# Altium PCB BloopPadMaxx_01.PcbDoc (part 2 of 3)
Units mm, origin at the board's own origin, x right, y up, seen from the top; angles counter-clockwise.
Board outline 209 x 212 mm, 2 copper layers (Top Layer, Bottom Layer), stack 1.571 mm thick; 206 components, 154 nets, 793 pads, 455 vias.
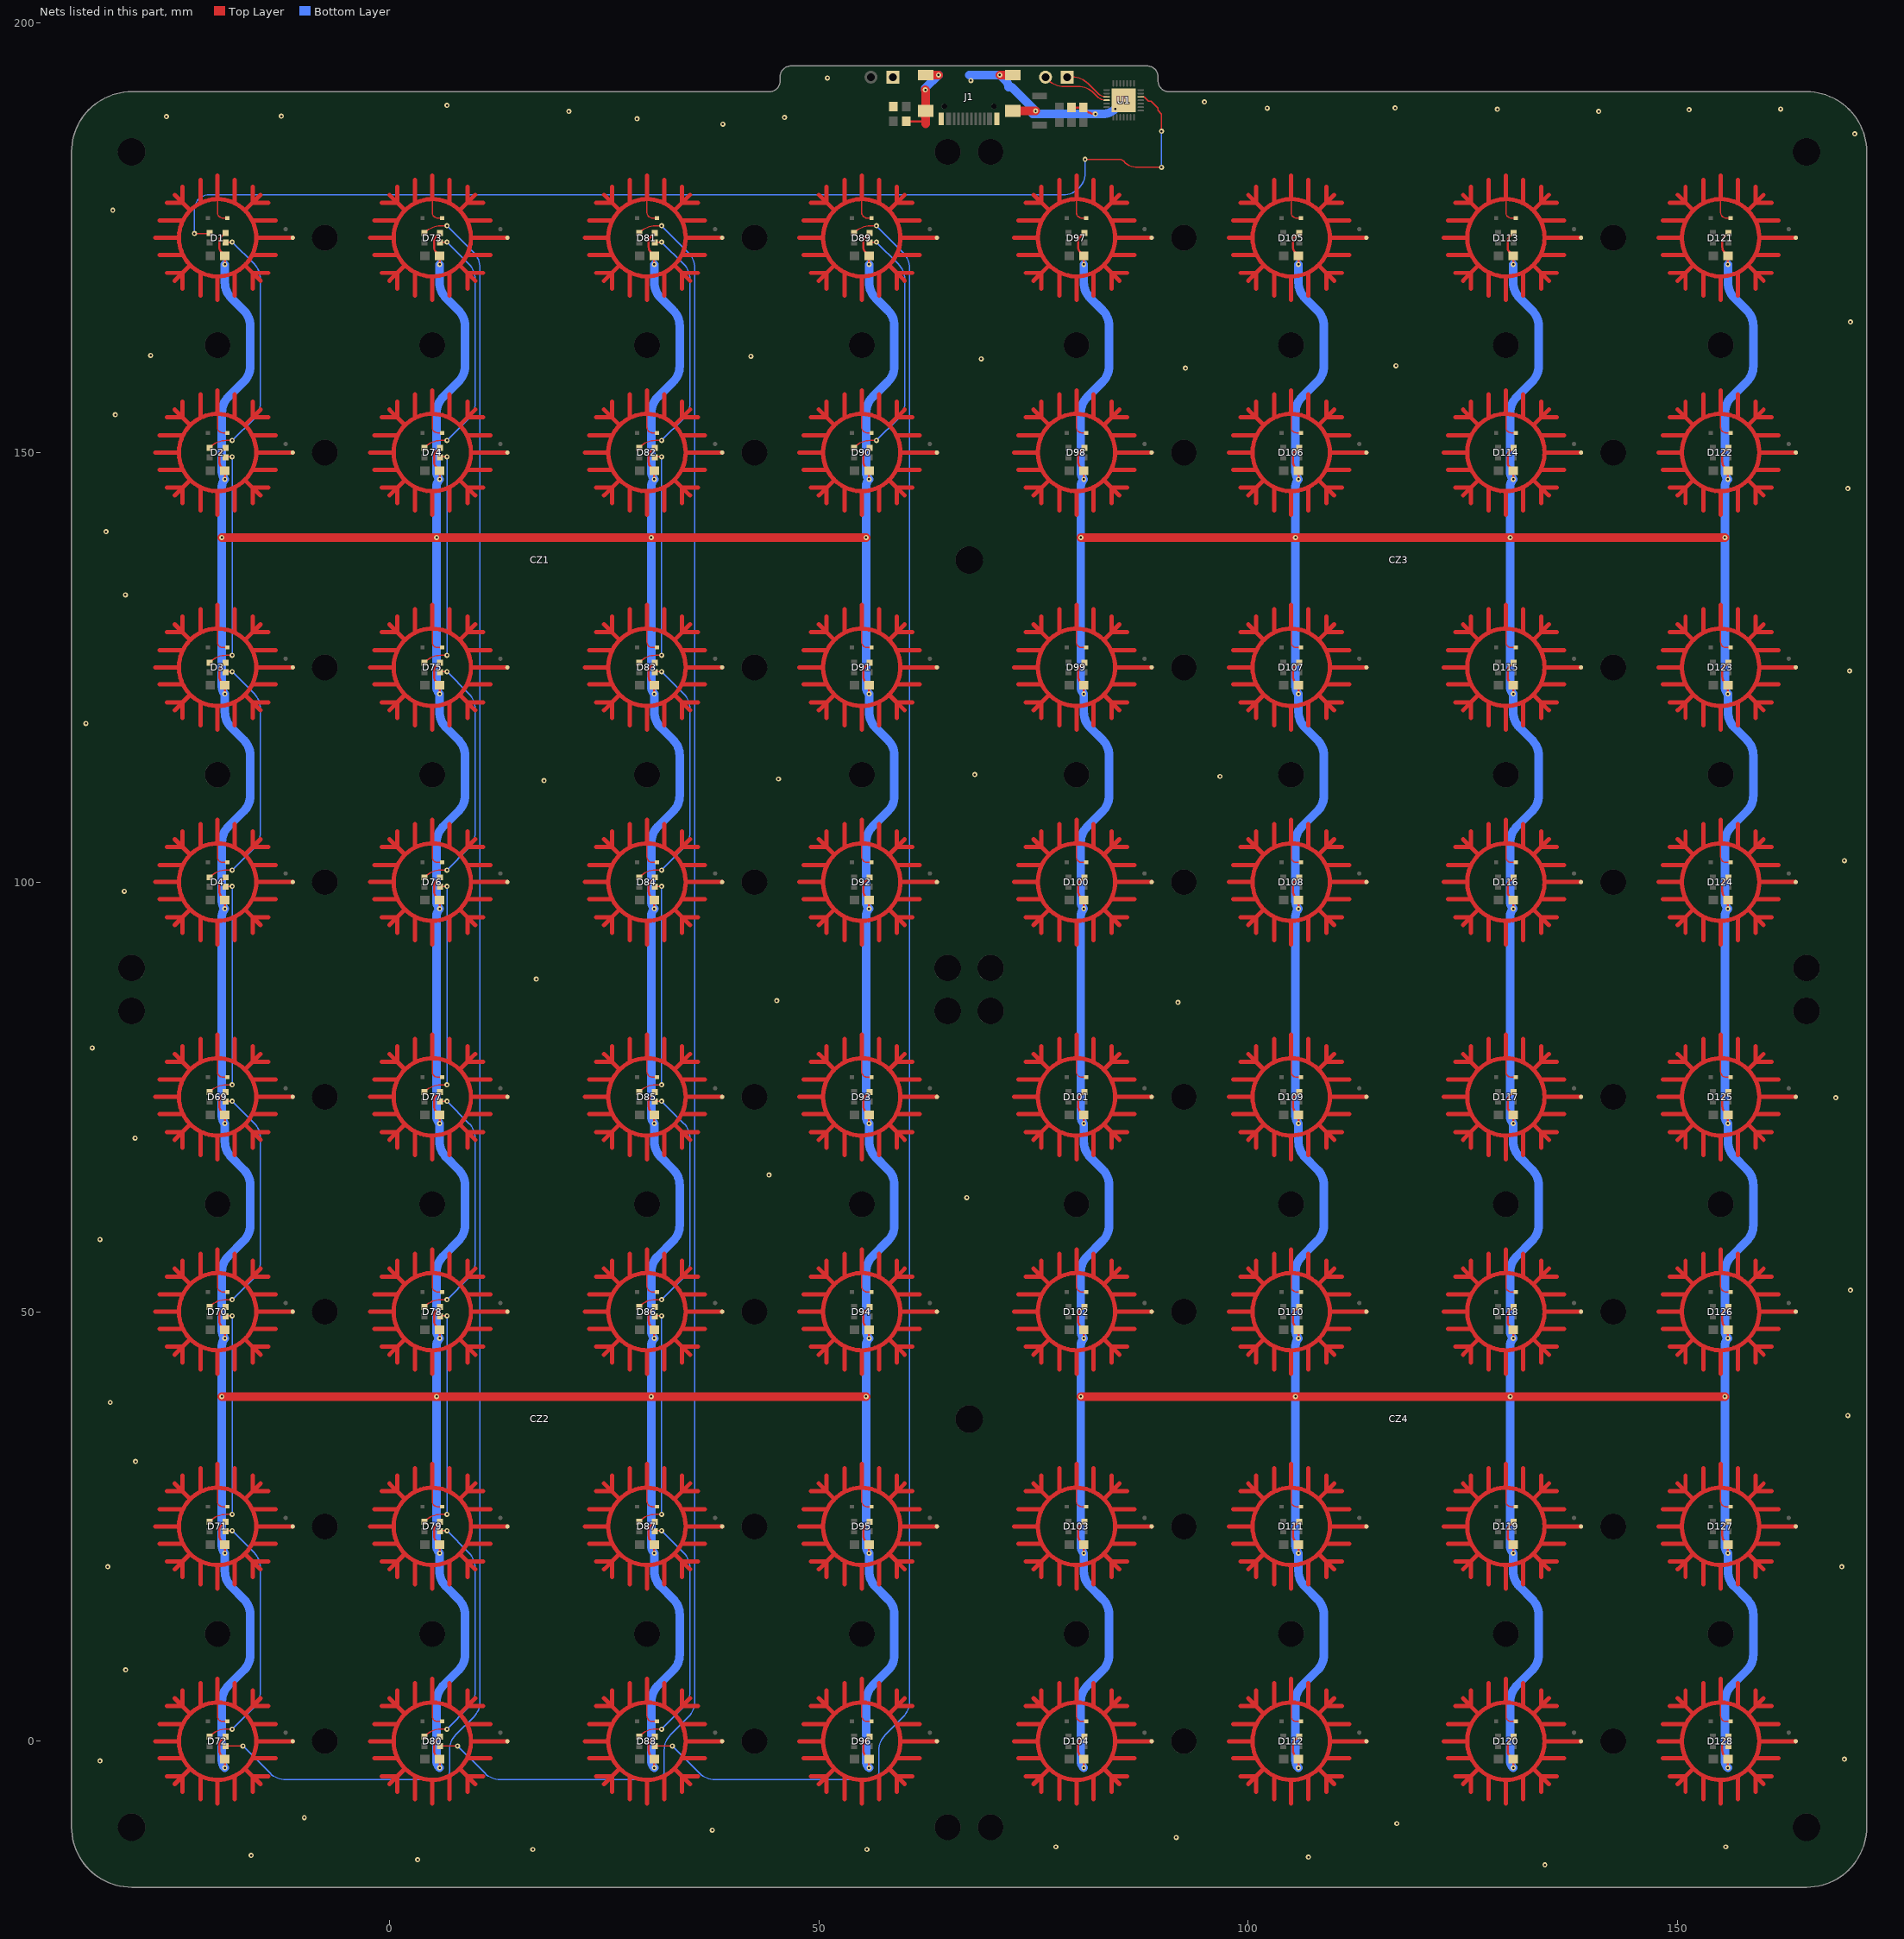
[diagram p2: the nets of this part, all layers, seen from the top]

## Via types
v1: diameter 0.6, hole 0.25, Top Layer to Bottom Layer, 455 vias

## Nets (pads, with @x,y where several pads share a name; then routed paths per layer and width w, separated by ;. In a path a pad name is that pad's centre, name@x,y a point inside that pad or via, vN(x,y) a via of type N, cw(c..) or ccw(c..) an arc to the next point about the centre after c; other vN are vias at no path point) (continued)
GND: C1.2 C2.2 C3.2 C4.2 C5.2 C6.2 C7.2 C8.2 C9.2 C10.2 C11.2 C12.2 C13.2 C14.2 C15.2 C16.2 C17.2 C18.2 C19.2 C20.2 C21.2 C22.2 C23.2 C24.2 C25.2 C26.2 C27.2 C28.2 C29.2 C30.2 C31.2 C32.2 C33.2 C34.2 C35.2 C36.2 C37.2 C38.2 C39.2 C40.2 C41.2 C42.2 C43.2 C44.2 C45.2 C46.2 C47.2 C48.2 C49.2 C50.2 C51.2 C52.2 C53.2 C54.2 C55.2 C56.2 C57.2 C58.2 C59.2 C60.2 C61.2 C62.2 C63.2 C64.2 C65.2 C66.2 D1.2 D2.2 D3.2 D4.2 D69.2 D70.2 D71.2 D72.2 D73.2 D74.2 D75.2 D76.2 D77.2 D78.2 D79.2 D80.2 D81.2 D82.2 D83.2 D84.2 D85.2 D86.2 D87.2 D88.2 D89.2 D90.2 D91.2 D92.2 D93.2 D94.2 D95.2 D96.2 D97.2 D98.2 D99.2 D100.2 D101.2 D102.2 D103.2 D104.2 D105.2 D106.2 D107.2 D108.2 D109.2 D110.2 D111.2 D112.2 D113.2 D114.2 D115.2 D116.2 D117.2 D118.2 D119.2 D120.2 D121.2 D122.2 D123.2 D124.2 D125.2 D126.2 D127.2 D128.2 J1.A1 J1.A12 J1.B1 J1.B12 J1.MH1 J1.MH2 J1.MH3 J1.MH4 P2.1 R2.2 R3.2 U1.29 | length 2081.9
  Top Layer w0.25: v1(-19.15,-3.1) C59.2@-19.15,-2.1 -19.552,-1.698 cw(c-18.955,-1.1) -19.8,-1.1 -19.8,-0.4 cw(c-19.106,-0.4) -19.597,0.091 -19.175,0.513 cw(c-19.085,0.423) D72.2@-19.085,0.55 ; v1(-19.15,21.9) C51.2@-19.15,22.9 -19.552,23.302 cw(c-18.955,23.9) -19.8,23.9 -19.8,24.6 cw(c-19.106,24.6) -19.597,25.091 -19.175,25.513 cw(c-19.085,25.423) D71.2@-19.085,25.55 ; v1(-19.15,46.9) C43.2@-19.15,47.9 -19.552,48.302 cw(c-18.955,48.9) -19.8,48.9 -19.8,49.6 cw(c-19.106,49.6) -19.597,50.091 -19.175,50.513 cw(c-19.085,50.423) D70.2@-19.085,50.55 ; v1(-19.15,71.9) C35.2@-19.15,72.9 -19.552,73.302 cw(c-18.955,73.9) -19.8,73.9 -19.8,74.6 cw(c-19.106,74.6) -19.597,75.091 -19.175,75.513 cw(c-19.085,75.423) D69.2@-19.085,75.55 ; v1(-19.15,96.9) C27.2@-19.15,97.9 -19.552,98.302 cw(c-18.955,98.9) -19.8,98.9 -19.8,99.6 cw(c-19.106,99.6) -19.597,100.091 -19.175,100.513 cw(c-19.085,100.423) D4.2@-19.085,100.55 ; v1(-19.15,121.9) C19.2@-19.15,122.9 -19.552,123.302 cw(c-18.955,123.9) -19.8,123.9 -19.8,124.6 cw(c-19.106,124.6) -19.597,125.091 -19.175,125.513 cw(c-19.085,125.423) D3.2@-19.085,125.55 ; v1(-19.15,146.9) C9.2@-19.15,147.9 -19.552,148.302 cw(c-18.955,148.9) -19.8,148.9 -19.8,149.6 cw(c-19.106,149.6) -19.597,150.091 -19.175,150.513 cw(c-19.085,150.423) D2.2@-19.085,150.55 ; v1(-19.15,171.9) C1.2@-19.15,172.9 -19.552,173.302 cw(c-18.955,173.9) -19.8,173.9 -19.8,174.6 cw(c-19.106,174.6) -19.597,175.091 -19.175,175.513 cw(c-19.085,175.423) D1.2@-19.085,175.55 ; v1(5.85,-3.1) C60.2@5.85,-2.1 5.448,-1.698 cw(c6.045,-1.1) 5.2,-1.1 5.2,-0.4 cw(c5.894,-0.4) 5.403,0.091 5.825,0.513 cw(c5.915,0.423) D80.2@5.915,0.55 ; v1(5.85,21.9) C52.2@5.85,22.9 5.448,23.302 cw(c6.045,23.9) 5.2,23.9 5.2,24.6 cw(c5.894,24.6) 5.403,25.091 5.825,25.513 cw(c5.915,25.423) D79.2@5.915,25.55 ; v1(5.85,46.9) C44.2@5.85,47.9 5.448,48.302 cw(c6.045,48.9) 5.2,48.9 5.2,49.6 cw(c5.894,49.6) 5.403,50.091 5.825,50.513 cw(c5.915,50.423) D78.2@5.915,50.55 ; v1(5.85,71.9) C36.2@5.85,72.9 5.448,73.302 cw(c6.045,73.9) 5.2,73.9 5.2,74.6 cw(c5.894,74.6) 5.403,75.091 5.825,75.513 cw(c5.915,75.423) D77.2@5.915,75.55 ; v1(5.85,96.9) C28.2@5.85,97.9 5.448,98.302 cw(c6.045,98.9) 5.2,98.9 5.2,99.6 cw(c5.894,99.6) 5.403,100.091 5.825,100.513 cw(c5.915,100.423) D76.2@5.915,100.55 ; v1(5.85,121.9) C20.2@5.85,122.9 5.448,123.302 cw(c6.045,123.9) 5.2,123.9 5.2,124.6 cw(c5.894,124.6) 5.403,125.091 5.825,125.513 cw(c5.915,125.423) D75.2@5.915,125.55 ; v1(5.85,146.9) C10.2@5.85,147.9 5.448,148.302 cw(c6.045,148.9) 5.2,148.9 5.2,149.6 cw(c5.894,149.6) 5.403,150.091 5.825,150.513 cw(c5.915,150.423) D74.2@5.915,150.55 ; v1(5.85,171.9) C2.2@5.85,172.9 5.448,173.302 cw(c6.045,173.9) 5.2,173.9 5.2,174.6 cw(c5.894,174.6) 5.403,175.091 5.825,175.513 cw(c5.915,175.423) D73.2@5.915,175.55 ; v1(30.85,-3.1) C61.2@30.85,-2.1 30.448,-1.698 cw(c31.045,-1.1) 30.2,-1.1 30.2,-0.4 cw(c30.894,-0.4) 30.403,0.091 30.825,0.513 cw(c30.915,0.423) D88.2@30.915,0.55 ; v1(30.85,21.9) C53.2@30.85,22.9 30.448,23.302 cw(c31.045,23.9) 30.2,23.9 30.2,24.6 cw(c30.894,24.6) 30.403,25.091 30.825,25.513 cw(c30.915,25.423) D87.2@30.915,25.55 ; v1(30.85,46.9) C45.2@30.85,47.9 30.448,48.302 cw(c31.045,48.9) 30.2,48.9 30.2,49.6 cw(c30.894,49.6) 30.403,50.091 30.825,50.513 cw(c30.915,50.423) D86.2@30.915,50.55 ; v1(30.85,71.9) C37.2@30.85,72.9 30.448,73.302 cw(c31.045,73.9) 30.2,73.9 30.2,74.6 cw(c30.894,74.6) 30.403,75.091 30.825,75.513 cw(c30.915,75.423) D85.2@30.915,75.55 ; v1(30.85,96.9) C29.2@30.85,97.9 30.448,98.302 cw(c31.045,98.9) 30.2,98.9 30.2,99.6 cw(c30.894,99.6) 30.403,100.091 30.825,100.513 cw(c30.915,100.423) D84.2@30.915,100.55 ; v1(30.85,121.9) C21.2@30.85,122.9 30.448,123.302 cw(c31.045,123.9) 30.2,123.9 30.2,124.6 cw(c30.894,124.6) 30.403,125.091 30.825,125.513 cw(c30.915,125.423) D83.2@30.915,125.55 ; v1(30.85,146.9) C11.2@30.85,147.9 30.448,148.302 cw(c31.045,148.9) 30.2,148.9 30.2,149.6 cw(c30.894,149.6) 30.403,150.091 30.825,150.513 cw(c30.915,150.423) D82.2@30.915,150.55 ; v1(30.85,171.9) C3.2@30.85,172.9 30.448,173.302 cw(c31.045,173.9) 30.2,173.9 30.2,174.6 cw(c30.894,174.6) 30.403,175.091 30.825,175.513 cw(c30.915,175.423) D81.2@30.915,175.55 ; v1(55.85,-3.1) C62.2@55.85,-2.1 55.448,-1.698 cw(c56.045,-1.1) 55.2,-1.1 55.2,-0.4 cw(c55.894,-0.4) 55.403,0.091 55.825,0.513 cw(c55.915,0.423) D96.2@55.915,0.55 ; v1(55.85,21.9) C54.2@55.85,22.9 55.448,23.302 cw(c56.045,23.9) 55.2,23.9 55.2,24.6 cw(c55.894,24.6) 55.403,25.091 55.825,25.513 cw(c55.915,25.423) D95.2@55.915,25.55 ; v1(55.85,46.9) C46.2@55.85,47.9 55.448,48.302 cw(c56.045,48.9) 55.2,48.9 55.2,49.6 cw(c55.894,49.6) 55.403,50.091 55.825,50.513 cw(c55.915,50.423) D94.2@55.915,50.55 ; v1(55.85,71.9) C38.2@55.85,72.9 55.448,73.302 cw(c56.045,73.9) 55.2,73.9 55.2,74.6 cw(c55.894,74.6) 55.403,75.091 55.825,75.513 cw(c55.915,75.423) D93.2@55.915,75.55 ; v1(55.85,96.9) C30.2@55.85,97.9 55.448,98.302 cw(c56.045,98.9) 55.2,98.9 55.2,99.6 cw(c55.894,99.6) 55.403,100.091 55.825,100.513 cw(c55.915,100.423) D92.2@55.915,100.55 ; v1(55.85,121.9) C22.2@55.85,122.9 55.448,123.302 cw(c56.045,123.9) 55.2,123.9 55.2,124.6 cw(c55.894,124.6) 55.403,125.091 55.825,125.513 cw(c55.915,125.423) D91.2@55.915,125.55 ; v1(55.85,146.9) C12.2@55.85,147.9 55.448,148.302 cw(c56.045,148.9) 55.2,148.9 55.2,149.6 cw(c55.894,149.6) 55.403,150.091 55.825,150.513 cw(c55.915,150.423) D90.2@55.915,150.55 ; v1(55.85,171.9) C4.2@55.85,172.9 55.448,173.302 cw(c56.045,173.9) 55.2,173.9 55.2,174.6 cw(c55.894,174.6) 55.403,175.091 55.825,175.513 cw(c55.915,175.423) D89.2@55.915,175.55 ; R3.2@60.2,188.55 61.962,188.55 62.4,188.988 62.4,189.738 J1.MH4@62.43,189.768 ; C18.2@79.4,190.15 C17.2@80.8,190.15 81.09,189.86 ccw(c82.2,190.969) v1(82.2,189.4) ; v1(80.85,-3.1) C63.2@80.85,-2.1 80.448,-1.698 cw(c81.045,-1.1) 80.2,-1.1 80.2,-0.4 cw(c80.894,-0.4) 80.403,0.091 80.825,0.513 cw(c80.915,0.423) D104.2@80.915,0.55 ; v1(80.85,21.9) C55.2@80.85,22.9 80.448,23.302 cw(c81.045,23.9) 80.2,23.9 80.2,24.6 cw(c80.894,24.6) 80.403,25.091 80.825,25.513 cw(c80.915,25.423) D103.2@80.915,25.55 ; v1(80.85,46.9) C47.2@80.85,47.9 80.448,48.302 cw(c81.045,48.9) 80.2,48.9 80.2,49.6 cw(c80.894,49.6) 80.403,50.091 80.825,50.513 cw(c80.915,50.423) D102.2@80.915,50.55 ; v1(80.85,71.9) C39.2@80.85,72.9 80.448,73.302 cw(c81.045,73.9) 80.2,73.9 80.2,74.6 cw(c80.894,74.6) 80.403,75.091 80.825,75.513 cw(c80.915,75.423) D101.2@80.915,75.55 ; v1(80.85,96.9) C31.2@80.85,97.9 80.448,98.302 cw(c81.045,98.9) 80.2,98.9 80.2,99.6 cw(c80.894,99.6) 80.403,100.091 80.825,100.513 cw(c80.915,100.423) D100.2@80.915,100.55 ; v1(80.85,121.9) C23.2@80.85,122.9 80.448,123.302 cw(c81.045,123.9) 80.2,123.9 80.2,124.6 cw(c80.894,124.6) 80.403,125.091 80.825,125.513 cw(c80.915,125.423) D99.2@80.915,125.55 ; v1(80.85,146.9) C13.2@80.85,147.9 80.448,148.302 cw(c81.045,148.9) 80.2,148.9 80.2,149.6 cw(c80.894,149.6) 80.403,150.091 80.825,150.513 cw(c80.915,150.423) D98.2@80.915,150.55 ; v1(80.85,171.9) C5.2@80.85,172.9 80.448,173.302 cw(c81.045,173.9) 80.2,173.9 80.2,174.6 cw(c80.894,174.6) 80.403,175.091 80.825,175.513 cw(c80.915,175.423) D97.2@80.915,175.55 ; v1(105.85,-3.1) C64.2@105.85,-2.1 105.448,-1.698 cw(c106.045,-1.1) 105.2,-1.1 105.2,-0.4 cw(c105.894,-0.4) 105.403,0.091 105.825,0.513 cw(c105.915,0.423) D112.2@105.915,0.55 ; v1(105.85,21.9) C56.2@105.85,22.9 105.448,23.302 cw(c106.045,23.9) 105.2,23.9 105.2,24.6 cw(c105.894,24.6) 105.403,25.091 105.825,25.513 cw(c105.915,25.423) D111.2@105.915,25.55 ; v1(105.85,46.9) C48.2@105.85,47.9 105.448,48.302 cw(c106.045,48.9) 105.2,48.9 105.2,49.6 cw(c105.894,49.6) 105.403,50.091 105.825,50.513 cw(c105.915,50.423) D110.2@105.915,50.55 ; v1(105.85,71.9) C40.2@105.85,72.9 105.448,73.302 cw(c106.045,73.9) 105.2,73.9 105.2,74.6 cw(c105.894,74.6) 105.403,75.091 105.825,75.513 cw(c105.915,75.423) D109.2@105.915,75.55 ; v1(105.85,96.9) C32.2@105.85,97.9 105.448,98.302 cw(c106.045,98.9) 105.2,98.9 105.2,99.6 cw(c105.894,99.6) 105.403,100.091 105.825,100.513 cw(c105.915,100.423) D108.2@105.915,100.55 ; v1(105.85,121.9) C24.2@105.85,122.9 105.448,123.302 cw(c106.045,123.9) 105.2,123.9 105.2,124.6 cw(c105.894,124.6) 105.403,125.091 105.825,125.513 cw(c105.915,125.423) D107.2@105.915,125.55 ; v1(105.85,146.9) C14.2@105.85,147.9 105.448,148.302 cw(c106.045,148.9) 105.2,148.9 105.2,149.6 cw(c105.894,149.6) 105.403,150.091 105.825,150.513 cw(c105.915,150.423) D106.2@105.915,150.55 ; v1(105.85,171.9) C6.2@105.85,172.9 105.448,173.302 cw(c106.045,173.9) 105.2,173.9 105.2,174.6 cw(c105.894,174.6) 105.403,175.091 105.825,175.513 cw(c105.915,175.423) D105.2@105.915,175.55 ; v1(130.85,-3.1) C65.2@130.85,-2.1 130.448,-1.698 cw(c131.045,-1.1) 130.2,-1.1 130.2,-0.4 cw(c130.894,-0.4) 130.403,0.091 130.825,0.513 cw(c130.915,0.423) D120.2@130.915,0.55 ; v1(130.85,21.9) C57.2@130.85,22.9 130.448,23.302 cw(c131.045,23.9) 130.2,23.9 130.2,24.6 cw(c130.894,24.6) 130.403,25.091 130.825,25.513 cw(c130.915,25.423) D119.2@130.915,25.55 ; v1(130.85,46.9) C49.2@130.85,47.9 130.448,48.302 cw(c131.045,48.9) 130.2,48.9 130.2,49.6 cw(c130.894,49.6) 130.403,50.091 130.825,50.513 cw(c130.915,50.423) D118.2@130.915,50.55 ; v1(130.85,71.9) C41.2@130.85,72.9 130.448,73.302 cw(c131.045,73.9) 130.2,73.9 130.2,74.6 cw(c130.894,74.6) 130.403,75.091 130.825,75.513 cw(c130.915,75.423) D117.2@130.915,75.55 ; v1(130.85,96.9) C33.2@130.85,97.9 130.448,98.302 cw(c131.045,98.9) 130.2,98.9 130.2,99.6 cw(c130.894,99.6) 130.403,100.091 130.825,100.513 cw(c130.915,100.423) D116.2@130.915,100.55 ; v1(130.85,121.9) C25.2@130.85,122.9 130.448,123.302 cw(c131.045,123.9) 130.2,123.9 130.2,124.6 cw(c130.894,124.6) 130.403,125.091 130.825,125.513 cw(c130.915,125.423) D115.2@130.915,125.55 ; v1(130.85,146.9) C15.2@130.85,147.9 130.448,148.302 cw(c131.045,148.9) 130.2,148.9 130.2,149.6 cw(c130.894,149.6) 130.403,150.091 130.825,150.513 cw(c130.915,150.423) D114.2@130.915,150.55 ; v1(130.85,171.9) C7.2@130.85,172.9 130.448,173.302 cw(c131.045,173.9) 130.2,173.9 130.2,174.6 cw(c130.894,174.6) 130.403,175.091 130.825,175.513 cw(c130.915,175.423) D113.2@130.915,175.55 ; v1(155.85,-3.1) C66.2@155.85,-2.1 155.448,-1.698 cw(c156.045,-1.1) 155.2,-1.1 155.2,-0.4 cw(c155.894,-0.4) 155.403,0.091 155.825,0.513 cw(c155.915,0.423) D128.2@155.915,0.55 ; v1(155.85,21.9) C58.2@155.85,22.9 155.448,23.302 cw(c156.045,23.9) 155.2,23.9 155.2,24.6 cw(c155.894,24.6) 155.403,25.091 155.825,25.513 cw(c155.915,25.423) D127.2@155.915,25.55 ; v1(155.85,46.9) C50.2@155.85,47.9 155.448,48.302 cw(c156.045,48.9) 155.2,48.9 155.2,49.6 cw(c155.894,49.6) 155.403,50.091 155.825,50.513 cw(c155.915,50.423) D126.2@155.915,50.55 ; v1(155.85,71.9) C42.2@155.85,72.9 155.448,73.302 cw(c156.045,73.9) 155.2,73.9 155.2,74.6 cw(c155.894,74.6) 155.403,75.091 155.825,75.513 cw(c155.915,75.423) D125.2@155.915,75.55 ; v1(155.85,96.9) C34.2@155.85,97.9 155.448,98.302 cw(c156.045,98.9) 155.2,98.9 155.2,99.6 cw(c155.894,99.6) 155.403,100.091 155.825,100.513 cw(c155.915,100.423) D124.2@155.915,100.55 ; v1(155.85,121.9) C26.2@155.85,122.9 155.448,123.302 cw(c156.045,123.9) 155.2,123.9 155.2,124.6 cw(c155.894,124.6) 155.403,125.091 155.825,125.513 cw(c155.915,125.423) D123.2@155.915,125.55 ; v1(155.85,146.9) C16.2@155.85,147.9 155.448,148.302 cw(c156.045,148.9) 155.2,148.9 155.2,149.6 cw(c155.894,149.6) 155.403,150.091 155.825,150.513 cw(c155.915,150.423) D122.2@155.915,150.55 ; v1(155.85,171.9) C8.2@155.85,172.9 155.448,173.302 cw(c156.045,173.9) 155.2,173.9 155.2,174.6 cw(c155.894,174.6) 155.403,175.091 155.825,175.513 cw(c155.915,175.423) D121.2@155.915,175.55
  Top Layer w1: v1(-19.5,40.121) v1(5.5,40.121) v1(30.5,40.121) v1(55.5,40.121) ; v1(-19.5,140.121) v1(5.5,140.121) v1(30.5,140.121) v1(55.5,140.121) ; v1(62.4,192.225) 62.43,192.195 J1.MH4@62.43,189.768 62.43,189.068 62.405,189.043 62.43,189.018 ; J1.MH3@62.43,193.948 v1(63.93,193.948) ; v1(71.07,193.948) J1.MH2@72.57,193.948 ; J1.MH1@72.57,189.768 75.232,189.768 v1(75.25,189.75) ; v1(80.5,40.121) v1(105.5,40.121) v1(130.5,40.121) v1(155.5,40.121) ; v1(80.5,140.121) v1(105.5,140.121) v1(130.5,140.121) v1(155.5,140.121) ; 62.43,189.018 62.43,188.55 62.43,188.268 62.43,189.018
  Bottom Layer w1: v1(-19.15,-3.1) cw(c-18.305,-2.255) -19.5,-2.255 -19.5,4.648 cw(c-16.96,4.648) -18.756,6.444 -16.944,8.256 ccw(c-18.74,10.052) -16.2,10.052 -16.2,14.738 ccw(c-18.74,14.738) -16.944,16.534 -18.406,17.996 cw(c-16.61,19.792) -19.15,19.792 v1(-19.15,21.9) cw(c-18.305,22.745) -19.5,22.745 v1(-19.5,40.121) -19.5,46.055 cw(c-18.305,46.055) v1(-19.15,46.9) cw(c-18.305,47.745) -19.5,47.745 -19.5,54.648 cw(c-16.96,54.648) -18.756,56.444 -16.944,58.256 ccw(c-18.74,60.052) -16.2,60.052 -16.2,64.738 ccw(c-18.74,64.738) -16.944,66.534 -18.406,67.996 cw(c-16.61,69.792) -19.15,69.792 v1(-19.15,71.9) cw(c-18.305,72.745) -19.5,72.745 -19.5,96.055 cw(c-18.305,96.055) v1(-19.15,96.9) cw(c-18.305,97.745) -19.5,97.745 -19.5,104.648 cw(c-16.96,104.648) -18.756,106.444 -16.944,108.256 ccw(c-18.74,110.052) -16.2,110.052 -16.2,114.738 ccw(c-18.74,114.738) -16.944,116.534 -18.406,117.996 cw(c-16.61,119.792) -19.15,119.792 v1(-19.15,121.9) cw(c-18.305,122.745) -19.5,122.745 -19.5,146.055 cw(c-18.305,146.055) v1(-19.15,146.9) cw(c-18.305,147.745) -19.5,147.745 -19.5,154.648 cw(c-16.96,154.648) -18.756,156.444 -16.944,158.256 ccw(c-18.74,160.052) -16.2,160.052 -16.2,164.738 ccw(c-18.74,164.738) -16.944,166.534 -18.406,167.996 cw(c-16.61,169.792) -19.15,169.792 v1(-19.15,171.9) ; v1(5.85,-3.1) cw(c6.695,-2.255) 5.5,-2.255 5.5,4.648 cw(c8.04,4.648) 6.244,6.444 8.056,8.256 ccw(c6.26,10.052) 8.8,10.052 8.8,14.738 ccw(c6.26,14.738) 8.056,16.534 6.594,17.996 cw(c8.39,19.792) 5.85,19.792 v1(5.85,21.9) cw(c6.695,22.745) 5.5,22.745 v1(5.5,40.121) 5.5,46.055 cw(c6.695,46.055) v1(5.85,46.9) cw(c6.695,47.745) 5.5,47.745 5.5,54.648 cw(c8.04,54.648) 6.244,56.444 8.056,58.256 ccw(c6.26,60.052) 8.8,60.052 8.8,64.738 ccw(c6.26,64.738) 8.056,66.534 6.594,67.996 cw(c8.39,69.792) 5.85,69.792 v1(5.85,71.9) cw(c6.695,72.745) 5.5,72.745 5.5,96.055 cw(c6.695,96.055) v1(5.85,96.9) cw(c6.695,97.745) 5.5,97.745 5.5,104.648 cw(c8.04,104.648) 6.244,106.444 8.056,108.256 ccw(c6.26,110.052) 8.8,110.052 8.8,114.738 ccw(c6.26,114.738) 8.056,116.534 6.594,117.996 cw(c8.39,119.792) 5.85,119.792 v1(5.85,121.9) cw(c6.695,122.745) 5.5,122.745 5.5,146.055 cw(c6.695,146.055) v1(5.85,146.9) cw(c6.695,147.745) 5.5,147.745 5.5,154.648 cw(c8.04,154.648) 6.244,156.444 8.056,158.256 ccw(c6.26,160.052) 8.8,160.052 8.8,164.738 ccw(c6.26,164.738) 8.056,166.534 6.594,167.996 cw(c8.39,169.792) 5.85,169.792 v1(5.85,171.9) ; v1(30.85,-3.1) cw(c31.695,-2.255) 30.5,-2.255 30.5,4.648 cw(c33.04,4.648) 31.244,6.444 33.056,8.256 ccw(c31.26,10.052) 33.8,10.052 33.8,14.738 ccw(c31.26,14.738) 33.056,16.534 31.594,17.996 cw(c33.39,19.792) 30.85,19.792 v1(30.85,21.9) cw(c31.695,22.745) 30.5,22.745 v1(30.5,40.121) 30.5,46.055 cw(c31.695,46.055) v1(30.85,46.9) cw(c31.695,47.745) 30.5,47.745 30.5,54.648 cw(c33.04,54.648) 31.244,56.444 33.056,58.256 ccw(c31.26,60.052) 33.8,60.052 33.8,64.738 ccw(c31.26,64.738) 33.056,66.534 31.594,67.996 cw(c33.39,69.792) 30.85,69.792 v1(30.85,71.9) cw(c31.695,72.745) 30.5,72.745 30.5,96.055 cw(c31.695,96.055) v1(30.85,96.9) cw(c31.695,97.745) 30.5,97.745 30.5,104.648 cw(c33.04,104.648) 31.244,106.444 33.056,108.256 ccw(c31.26,110.052) 33.8,110.052 33.8,114.738 ccw(c31.26,114.738) 33.056,116.534 31.594,117.996 cw(c33.39,119.792) 30.85,119.792 v1(30.85,121.9) cw(c31.695,122.745) 30.5,122.745 30.5,146.055 cw(c31.695,146.055) v1(30.85,146.9) cw(c31.695,147.745) 30.5,147.745 30.5,154.648 cw(c33.04,154.648) 31.244,156.444 33.056,158.256 ccw(c31.26,160.052) 33.8,160.052 33.8,164.738 ccw(c31.26,164.738) 33.056,166.534 31.594,167.996 cw(c33.39,169.792) 30.85,169.792 v1(30.85,171.9) ; v1(55.85,-3.1) cw(c56.695,-2.255) 55.5,-2.255 55.5,4.648 cw(c58.04,4.648) 56.244,6.444 58.056,8.256 ccw(c56.26,10.052) 58.8,10.052 58.8,14.738 ccw(c56.26,14.738) 58.056,16.534 56.594,17.996 cw(c58.39,19.792) 55.85,19.792 v1(55.85,21.9) cw(c56.695,22.745) 55.5,22.745 v1(55.5,40.121) 55.5,46.055 cw(c56.695,46.055) v1(55.85,46.9) cw(c56.695,47.745) 55.5,47.745 55.5,54.648 cw(c58.04,54.648) 56.244,56.444 58.056,58.256 ccw(c56.26,60.052) 58.8,60.052 58.8,64.738 ccw(c56.26,64.738) 58.056,66.534 56.594,67.996 cw(c58.39,69.792) 55.85,69.792 v1(55.85,71.9) cw(c56.695,72.745) 55.5,72.745 55.5,96.055 cw(c56.695,96.055) v1(55.85,96.9) cw(c56.695,97.745) 55.5,97.745 55.5,104.648 cw(c58.04,104.648) 56.244,106.444 58.056,108.256 ccw(c56.26,110.052) 58.8,110.052 58.8,114.738 ccw(c56.26,114.738) 58.056,116.534 56.594,117.996 cw(c58.39,119.792) 55.85,119.792 v1(55.85,121.9) cw(c56.695,122.745) 55.5,122.745 55.5,146.055 cw(c56.695,146.055) v1(55.85,146.9) cw(c56.695,147.745) 55.5,147.745 55.5,154.648 cw(c58.04,154.648) 56.244,156.444 58.056,158.256 ccw(c56.26,160.052) 58.8,160.052 58.8,164.738 ccw(c56.26,164.738) 58.056,166.534 56.594,167.996 cw(c58.39,169.792) 55.85,169.792 v1(55.85,171.9) ; v1(62.4,192.225) 62.4,192.418 v1(63.93,193.948) ; 67.5,193.948 v1(71.07,193.948) 71.826,193.191 cw(c71.185,192.55) 72.092,192.55 72.45,192.55 v1(75.25,189.75) ; 74.9,189.4 v1(82.2,189.4) 83.051,189.4 ccw(c83.051,191.449) v1(84.5,190) ; v1(80.85,-3.1) cw(c81.695,-2.255) 80.5,-2.255 80.5,4.648 cw(c83.04,4.648) 81.244,6.444 83.056,8.256 ccw(c81.26,10.052) 83.8,10.052 83.8,14.738 ccw(c81.26,14.738) 83.056,16.534 81.594,17.996 cw(c83.39,19.792) 80.85,19.792 v1(80.85,21.9) cw(c81.695,22.745) 80.5,22.745 v1(80.5,40.121) 80.5,46.055 cw(c81.695,46.055) v1(80.85,46.9) cw(c81.695,47.745) 80.5,47.745 80.5,54.648 cw(c83.04,54.648) 81.244,56.444 83.056,58.256 ccw(c81.26,60.052) 83.8,60.052 83.8,64.738 ccw(c81.26,64.738) 83.056,66.534 81.594,67.996 cw(c83.39,69.792) 80.85,69.792 v1(80.85,71.9) cw(c81.695,72.745) 80.5,72.745 80.5,96.055 cw(c81.695,96.055) v1(80.85,96.9) cw(c81.695,97.745) 80.5,97.745 80.5,104.648 cw(c83.04,104.648) 81.244,106.444 83.056,108.256 ccw(c81.26,110.052) 83.8,110.052 83.8,114.738 ccw(c81.26,114.738) 83.056,116.534 81.594,117.996 cw(c83.39,119.792) 80.85,119.792 v1(80.85,121.9) cw(c81.695,122.745) 80.5,122.745 80.5,146.055 cw(c81.695,146.055) v1(80.85,146.9) cw(c81.695,147.745) 80.5,147.745 80.5,154.648 cw(c83.04,154.648) 81.244,156.444 83.056,158.256 ccw(c81.26,160.052) 83.8,160.052 83.8,164.738 ccw(c81.26,164.738) 83.056,166.534 81.594,167.996 cw(c83.39,169.792) 80.85,169.792 v1(80.85,171.9) ; v1(105.85,-3.1) cw(c106.695,-2.255) 105.5,-2.255 105.5,4.648 cw(c108.04,4.648) 106.244,6.444 108.056,8.256 ccw(c106.26,10.052) 108.8,10.052 108.8,14.738 ccw(c106.26,14.738) 108.056,16.534 106.594,17.996 cw(c108.39,19.792) 105.85,19.792 v1(105.85,21.9) cw(c106.695,22.745) 105.5,22.745 v1(105.5,40.121) 105.5,46.055 cw(c106.695,46.055) v1(105.85,46.9) cw(c106.695,47.745) 105.5,47.745 105.5,54.648 cw(c108.04,54.648) 106.244,56.444 108.056,58.256 ccw(c106.26,60.052) 108.8,60.052 108.8,64.738 ccw(c106.26,64.738) 108.056,66.534 106.594,67.996 cw(c108.39,69.792) 105.85,69.792 v1(105.85,71.9) cw(c106.695,72.745) 105.5,72.745 105.5,96.055 cw(c106.695,96.055) v1(105.85,96.9) cw(c106.695,97.745) 105.5,97.745 105.5,104.648 cw(c108.04,104.648) 106.244,106.444 108.056,108.256 ccw(c106.26,110.052) 108.8,110.052 108.8,114.738 ccw(c106.26,114.738) 108.056,116.534 106.594,117.996 cw(c108.39,119.792) 105.85,119.792 v1(105.85,121.9) cw(c106.695,122.745) 105.5,122.745 105.5,146.055 cw(c106.695,146.055) v1(105.85,146.9) cw(c106.695,147.745) 105.5,147.745 105.5,154.648 cw(c108.04,154.648) 106.244,156.444 108.056,158.256 ccw(c106.26,160.052) 108.8,160.052 108.8,164.738 ccw(c106.26,164.738) 108.056,166.534 106.594,167.996 cw(c108.39,169.792) 105.85,169.792 v1(105.85,171.9) ; v1(130.85,-3.1) cw(c131.695,-2.255) 130.5,-2.255 130.5,4.648 cw(c133.04,4.648) 131.244,6.444 133.056,8.256 ccw(c131.26,10.052) 133.8,10.052 133.8,14.738 ccw(c131.26,14.738) 133.056,16.534 131.594,17.996 cw(c133.39,19.792) 130.85,19.792 v1(130.85,21.9) cw(c131.695,22.745) 130.5,22.745 v1(130.5,40.121) 130.5,46.055 cw(c131.695,46.055) v1(130.85,46.9) cw(c131.695,47.745) 130.5,47.745 130.5,54.648 cw(c133.04,54.648) 131.244,56.444 133.056,58.256 ccw(c131.26,60.052) 133.8,60.052 133.8,64.738 ccw(c131.26,64.738) 133.056,66.534 131.594,67.996 cw(c133.39,69.792) 130.85,69.792 v1(130.85,71.9) cw(c131.695,72.745) 130.5,72.745 130.5,96.055 cw(c131.695,96.055) v1(130.85,96.9) cw(c131.695,97.745) 130.5,97.745 130.5,104.648 cw(c133.04,104.648) 131.244,106.444 133.056,108.256 ccw(c131.26,110.052) 133.8,110.052 133.8,114.738 ccw(c131.26,114.738) 133.056,116.534 131.594,117.996 cw(c133.39,119.792) 130.85,119.792 v1(130.85,121.9) cw(c131.695,122.745) 130.5,122.745 130.5,146.055 cw(c131.695,146.055) v1(130.85,146.9) cw(c131.695,147.745) 130.5,147.745 130.5,154.648 cw(c133.04,154.648) 131.244,156.444 133.056,158.256 ccw(c131.26,160.052) 133.8,160.052 133.8,164.738 ccw(c131.26,164.738) 133.056,166.534 131.594,167.996 cw(c133.39,169.792) 130.85,169.792 v1(130.85,171.9) ; v1(155.85,-3.1) cw(c156.695,-2.255) 155.5,-2.255 155.5,4.648 cw(c158.04,4.648) 156.244,6.444 158.056,8.256 ccw(c156.26,10.052) 158.8,10.052 158.8,14.738 ccw(c156.26,14.738) 158.056,16.534 156.594,17.996 cw(c158.39,19.792) 155.85,19.792 v1(155.85,21.9) cw(c156.695,22.745) 155.5,22.745 v1(155.5,40.121) 155.5,46.055 cw(c156.695,46.055) v1(155.85,46.9) cw(c156.695,47.745) 155.5,47.745 155.5,54.648 cw(c158.04,54.648) 156.244,56.444 158.056,58.256 ccw(c156.26,60.052) 158.8,60.052 158.8,64.738 ccw(c156.26,64.738) 158.056,66.534 156.594,67.996 cw(c158.39,69.792) 155.85,69.792 v1(155.85,71.9) cw(c156.695,72.745) 155.5,72.745 155.5,96.055 cw(c156.695,96.055) v1(155.85,96.9) cw(c156.695,97.745) 155.5,97.745 155.5,104.648 cw(c158.04,104.648) 156.244,106.444 158.056,108.256 ccw(c156.26,110.052) 158.8,110.052 158.8,114.738 ccw(c156.26,114.738) 158.056,116.534 156.594,117.996 cw(c158.39,119.792) 155.85,119.792 v1(155.85,121.9) cw(c156.695,122.745) 155.5,122.745 155.5,146.055 cw(c156.695,146.055) v1(155.85,146.9) cw(c156.695,147.745) 155.5,147.745 155.5,154.648 cw(c158.04,154.648) 156.244,156.444 158.056,158.256 ccw(c156.26,160.052) 158.8,160.052 158.8,164.738 ccw(c156.26,164.738) 158.056,166.534 156.594,167.996 cw(c158.39,169.792) 155.85,169.792 v1(155.85,171.9)
  other v1: 134.537,-14.389 3.3,-13.8 107,-13.5 -16.1,-13.3 16.7,-12.6 55.6,-12.6 77.6,-12.3 155.6,-12.3 91.6,-11.2 37.598,-10.35 117.289,-9.586 -9.9,-8.9 -33.7,-2.3 169.4,-2.1 -30.7,8.3 -32.8,20.3 169.1,20.3 -29.54,32.552 169.8,37.9 -32.5,39.43 170.1,52.5 -33.7,58.4 67.237,63.279 44.2,65.9 -29.6,70.2 168.4,74.9 -34.6,80.7 91.8,86 45.1,86.2 17.1,88.7 -30.85,98.925 169.4,102.5 18,111.8 45.3,112 96.7,112.3 68.156,112.514 -35.326,118.466 170.017,124.58 -30.741,133.422 -33,140.8 169.8,145.8 -31.9,154.4 92.689,159.835 117.2,160.1 68.9,160.9 42.1,161.2 -27.8,161.3 170.1,165.2 -32.2,178.2 170.608,187.1 38.82,188.228 28.839,188.848 46,189 -25.962,189.096 -12.571,189.158 20.9,189.7 140.8,189.7 151.317,189.916 128.998,189.952 161.984,189.987 102.208,190.092 117.1,190.1 6.7,190.4 94.9,190.8 67.7,193.3 51,193.6
IO.DCK: P1.1 U1.24 | length 5.4
  Top Layer w0.15: P1.1@78.93,193.7 79.548,193.7 cw(c79.548,191.16) 81.344,192.956 82.458,191.842 ccw(c83.525,192.909) U1.24@83.525,191.4
IO.DIO: P1.2 U1.25 | length 8
  Top Layer w0.15: P1.2@76.39,193.7 76.746,193.344 ccw(c78.542,195.14) 78.542,192.6 80.224,192.6 cw(c80.224,190.06) 82.02,191.856 82.417,191.459 ccw(c83.525,192.567) U1.25@83.525,191
LED.DIN: D1.3 U1.12 | length 131.1
  Top Layer w0.15: v1(-22.7,175.5) -20.965,175.5 D1.3@-20.915,175.55 ; v1(81,184.14) 84.921,184.14 cw(c84.921,183.321) 85.5,183.9 ccw(c87.118,185.42) 87.118,183.2 v1(89.9,183.2) ; U1.12@87.475,191.4 87.9,191.4 88.4,190.9 88.665,190.9 89.465,190.1 89.465,189.835 89.9,189.4 v1(89.9,187.4)
  Bottom Layer w0.15: v1(-22.7,175.5) -22.7,178.3 cw(c-21,178.3) -21,180 78.46,180 ccw(c78.46,182.54) 81,182.54 v1(81,184.14) ; v1(89.9,183.2) v1(89.9,187.4)
LED.DOUT: D128.1
NetCZ1_1: CZ1.1 D17.C | length 3.1
  Top Layer w0.15: -20,179.5 -20,177.9 ccw(c-19.4,177.9) -19.4,177.3 D17.C@-18.86,177.3
NetCZ1_3: CZ1.3 D13.C | length 3.1
  Top Layer w0.15: 5,179.5 5,177.9 ccw(c5.6,177.9) 5.6,177.3 D13.C@6.14,177.3
NetCZ1_5: CZ1.5 D9.C | length 3.1
  Top Layer w0.15: 30,179.5 30,177.9 ccw(c30.6,177.9) 30.6,177.3 D9.C@31.14,177.3
NetCZ1_7: CZ1.7 D5.C | length 3.1
  Top Layer w0.15: 55,179.5 55,177.9 ccw(c55.6,177.9) 55.6,177.3 D5.C@56.14,177.3
NetCZ1_9: CZ1.9 D33.C | length 3.1
  Top Layer w0.15: -20,154.5 -20,152.9 ccw(c-19.4,152.9) -19.4,152.3 D33.C@-18.86,152.3
NetCZ1_11: CZ1.11 D29.C | length 3.1
  Top Layer w0.15: 5,154.5 5,152.9 ccw(c5.6,152.9) 5.6,152.3 D29.C@6.14,152.3
NetCZ1_13: CZ1.13 D25.C | length 3.1
  Top Layer w0.15: 30,154.5 30,152.9 ccw(c30.6,152.9) 30.6,152.3 D25.C@31.14,152.3
NetCZ1_15: CZ1.15 D21.C | length 3.1
  Top Layer w0.15: 55,154.5 55,152.9 ccw(c55.6,152.9) 55.6,152.3 D21.C@56.14,152.3
NetCZ1_17: CZ1.17 D49.C | length 3.1
  Top Layer w0.15: -20,129.5 -20,127.9 ccw(c-19.4,127.9) -19.4,127.3 D49.C@-18.86,127.3
NetCZ1_19: CZ1.19 D45.C | length 3.1
  Top Layer w0.15: 5,129.5 5,127.9 ccw(c5.6,127.9) 5.6,127.3 D45.C@6.14,127.3
NetCZ1_21: CZ1.21 D41.C | length 3.1
  Top Layer w0.15: 30,129.5 30,127.9 ccw(c30.6,127.9) 30.6,127.3 D41.C@31.14,127.3
NetCZ1_23: CZ1.23 D37.C | length 3.1
  Top Layer w0.15: 55,129.5 55,127.9 ccw(c55.6,127.9) 55.6,127.3 D37.C@56.14,127.3
NetCZ1_25: CZ1.25 D65.C | length 3.1
  Top Layer w0.15: -20,104.5 -20,102.9 ccw(c-19.4,102.9) -19.4,102.3 D65.C@-18.86,102.3
NetCZ1_27: CZ1.27 D61.C | length 3.1
  Top Layer w0.15: 5,104.5 5,102.9 ccw(c5.6,102.9) 5.6,102.3 D61.C@6.14,102.3
NetCZ1_29: CZ1.29 D57.C | length 3.1
  Top Layer w0.15: 30,104.5 30,102.9 ccw(c30.6,102.9) 30.6,102.3 D57.C@31.14,102.3
NetCZ1_31: CZ1.31 D53.C | length 3.1
  Top Layer w0.15: 55,104.5 55,102.9 ccw(c55.6,102.9) 55.6,102.3 D53.C@56.14,102.3
NetCZ2_1: CZ2.1 D18.C | length 3.1
  Top Layer w0.15: -20,79.5 -20,77.9 ccw(c-19.4,77.9) -19.4,77.3 D18.C@-18.86,77.3
NetCZ2_3: CZ2.3 D14.C | length 3.1
  Top Layer w0.15: 5,79.5 5,77.9 ccw(c5.6,77.9) 5.6,77.3 D14.C@6.14,77.3
NetCZ2_5: CZ2.5 D10.C | length 3.1
  Top Layer w0.15: 30,79.5 30,77.9 ccw(c30.6,77.9) 30.6,77.3 D10.C@31.14,77.3
NetCZ2_7: CZ2.7 D6.C | length 3.1
  Top Layer w0.15: 55,79.5 55,77.9 ccw(c55.6,77.9) 55.6,77.3 D6.C@56.14,77.3
NetCZ2_9: CZ2.9 D34.C | length 3.1
  Top Layer w0.15: -20,54.5 -20,52.9 ccw(c-19.4,52.9) -19.4,52.3 D34.C@-18.86,52.3
NetCZ2_11: CZ2.11 D30.C | length 3.1
  Top Layer w0.15: 5,54.5 5,52.9 ccw(c5.6,52.9) 5.6,52.3 D30.C@6.14,52.3
NetCZ2_13: CZ2.13 D26.C | length 3.1
  Top Layer w0.15: 30,54.5 30,52.9 ccw(c30.6,52.9) 30.6,52.3 D26.C@31.14,52.3
NetCZ2_15: CZ2.15 D22.C | length 3.1
  Top Layer w0.15: 55,54.5 55,52.9 ccw(c55.6,52.9) 55.6,52.3 D22.C@56.14,52.3
NetCZ2_17: CZ2.17 D50.C | length 3.1
  Top Layer w0.15: -20,29.5 -20,27.9 ccw(c-19.4,27.9) -19.4,27.3 D50.C@-18.86,27.3
NetCZ2_19: CZ2.19 D46.C | length 3.1
  Top Layer w0.15: 5,29.5 5,27.9 ccw(c5.6,27.9) 5.6,27.3 D46.C@6.14,27.3
NetCZ2_21: CZ2.21 D42.C | length 3.1
  Top Layer w0.15: 30,29.5 30,27.9 ccw(c30.6,27.9) 30.6,27.3 D42.C@31.14,27.3
NetCZ2_23: CZ2.23 D38.C | length 3.1
  Top Layer w0.15: 55,29.5 55,27.9 ccw(c55.6,27.9) 55.6,27.3 D38.C@56.14,27.3
NetCZ2_25: CZ2.25 D66.C | length 3.1
  Top Layer w0.15: -20,4.5 -20,2.9 ccw(c-19.4,2.9) -19.4,2.3 D66.C@-18.86,2.3
NetCZ2_27: CZ2.27 D62.C | length 3.1
  Top Layer w0.15: 5,4.5 5,2.9 ccw(c5.6,2.9) 5.6,2.3 D62.C@6.14,2.3
NetCZ2_29: CZ2.29 D58.C | length 3.1
  Top Layer w0.15: 30,4.5 30,2.9 ccw(c30.6,2.9) 30.6,2.3 D58.C@31.14,2.3
NetCZ2_31: CZ2.31 D54.C | length 3.1
  Top Layer w0.15: 55,4.5 55,2.9 ccw(c55.6,2.9) 55.6,2.3 D54.C@56.14,2.3
NetCZ3_1: CZ3.1 D19.C | length 3.1
  Top Layer w0.15: 80,179.5 80,177.9 ccw(c80.6,177.9) 80.6,177.3 D19.C@81.14,177.3
NetCZ3_3: CZ3.3 D15.C | length 3.1
  Top Layer w0.15: 105,179.5 105,177.9 ccw(c105.6,177.9) 105.6,177.3 D15.C@106.14,177.3
NetCZ3_5: CZ3.5 D11.C | length 3.1
  Top Layer w0.15: 130,179.5 130,177.9 ccw(c130.6,177.9) 130.6,177.3 D11.C@131.14,177.3
NetCZ3_7: CZ3.7 D7.C | length 3.1
  Top Layer w0.15: 155,179.5 155,177.9 ccw(c155.6,177.9) 155.6,177.3 D7.C@156.14,177.3
NetCZ3_9: CZ3.9 D35.C | length 3.1
  Top Layer w0.15: 80,154.5 80,152.9 ccw(c80.6,152.9) 80.6,152.3 D35.C@81.14,152.3
NetCZ3_11: CZ3.11 D31.C | length 3.1
  Top Layer w0.15: 105,154.5 105,152.9 ccw(c105.6,152.9) 105.6,152.3 D31.C@106.14,152.3
NetCZ3_13: CZ3.13 D27.C | length 3.1
  Top Layer w0.15: 130,154.5 130,152.9 ccw(c130.6,152.9) 130.6,152.3 D27.C@131.14,152.3
NetCZ3_15: CZ3.15 D23.C | length 3.1
  Top Layer w0.15: 155,154.5 155,152.9 ccw(c155.6,152.9) 155.6,152.3 D23.C@156.14,152.3
NetCZ3_17: CZ3.17 D51.C | length 3.1
  Top Layer w0.15: 80,129.5 80,127.9 ccw(c80.6,127.9) 80.6,127.3 D51.C@81.14,127.3
NetCZ3_19: CZ3.19 D47.C | length 3.1
  Top Layer w0.15: 105,129.5 105,127.9 ccw(c105.6,127.9) 105.6,127.3 D47.C@106.14,127.3
NetCZ3_21: CZ3.21 D43.C | length 3.1
  Top Layer w0.15: 130,129.5 130,127.9 ccw(c130.6,127.9) 130.6,127.3 D43.C@131.14,127.3
NetCZ3_23: CZ3.23 D39.C | length 3.1
  Top Layer w0.15: 155,129.5 155,127.9 ccw(c155.6,127.9) 155.6,127.3 D39.C@156.14,127.3
NetCZ3_25: CZ3.25 D67.C | length 3.1
  Top Layer w0.15: 80,104.5 80,102.9 ccw(c80.6,102.9) 80.6,102.3 D67.C@81.14,102.3
NetCZ3_27: CZ3.27 D63.C | length 3.1
  Top Layer w0.15: 105,104.5 105,102.9 ccw(c105.6,102.9) 105.6,102.3 D63.C@106.14,102.3
NetCZ3_29: CZ3.29 D59.C | length 3.1
  Top Layer w0.15: 130,104.5 130,102.9 ccw(c130.6,102.9) 130.6,102.3 D59.C@131.14,102.3
NetCZ3_31: CZ3.31 D55.C | length 3.1
  Top Layer w0.15: 155,104.5 155,102.9 ccw(c155.6,102.9) 155.6,102.3 D55.C@156.14,102.3
NetCZ4_1: CZ4.1 D20.C | length 3.1
  Top Layer w0.15: 80,79.5 80,77.9 ccw(c80.6,77.9) 80.6,77.3 D20.C@81.14,77.3
NetCZ4_3: CZ4.3 D16.C | length 3.1
  Top Layer w0.15: 105,79.5 105,77.9 ccw(c105.6,77.9) 105.6,77.3 D16.C@106.14,77.3
NetCZ4_5: CZ4.5 D12.C | length 3.1
  Top Layer w0.15: 130,79.5 130,77.9 ccw(c130.6,77.9) 130.6,77.3 D12.C@131.14,77.3
NetCZ4_7: CZ4.7 D8.C | length 3.1
  Top Layer w0.15: 155,79.5 155,77.9 ccw(c155.6,77.9) 155.6,77.3 D8.C@156.14,77.3
NetCZ4_9: CZ4.9 D36.C | length 3.1
  Top Layer w0.15: 80,54.5 80,52.9 ccw(c80.6,52.9) 80.6,52.3 D36.C@81.14,52.3
NetCZ4_11: CZ4.11 D32.C | length 3.1
  Top Layer w0.15: 105,54.5 105,52.9 ccw(c105.6,52.9) 105.6,52.3 D32.C@106.14,52.3
NetCZ4_13: CZ4.13 D28.C | length 3.1
  Top Layer w0.15: 130,54.5 130,52.9 ccw(c130.6,52.9) 130.6,52.3 D28.C@131.14,52.3
NetCZ4_15: CZ4.15 D24.C | length 3.1
  Top Layer w0.15: 155,54.5 155,52.9 ccw(c155.6,52.9) 155.6,52.3 D24.C@156.14,52.3
NetCZ4_17: CZ4.17 D52.C | length 3.1
  Top Layer w0.15: 80,29.5 80,27.9 ccw(c80.6,27.9) 80.6,27.3 D52.C@81.14,27.3
NetCZ4_19: CZ4.19 D48.C | length 3.1
  Top Layer w0.15: 105,29.5 105,27.9 ccw(c105.6,27.9) 105.6,27.3 D48.C@106.14,27.3
NetCZ4_21: CZ4.21 D44.C | length 3.1
  Top Layer w0.15: 130,29.5 130,27.9 ccw(c130.6,27.9) 130.6,27.3 D44.C@131.14,27.3
NetCZ4_23: CZ4.23 D40.C | length 3.1
  Top Layer w0.15: 155,29.5 155,27.9 ccw(c155.6,27.9) 155.6,27.3 D40.C@156.14,27.3
NetCZ4_25: CZ4.25 D68.C | length 3.1
  Top Layer w0.15: 80,4.5 80,2.9 ccw(c80.6,2.9) 80.6,2.3 D68.C@81.14,2.3
NetCZ4_27: CZ4.27 D64.C | length 3.1
  Top Layer w0.15: 105,4.5 105,2.9 ccw(c105.6,2.9) 105.6,2.3 D64.C@106.14,2.3
NetCZ4_29: CZ4.29 D60.C | length 3.1
  Top Layer w0.15: 130,4.5 130,2.9 ccw(c130.6,2.9) 130.6,2.3 D60.C@131.14,2.3
NetCZ4_31: CZ4.31 D56.C | length 3.1
  Top Layer w0.15: 155,4.5 155,2.9 ccw(c155.6,2.9) 155.6,2.3 D56.C@156.14,2.3
NetD1_1: D1.1 D2.3 | length 29.3
  Top Layer w0.15: D2.3@-20.915,150.55 -20.809,150.656 cw(c-19.013,148.86) -19.013,151.4 v1(-18.3,151.4) ; D1.1@-19.085,174.45 -19.035,174.5 v1(-18.3,174.5)
  Bottom Layer w0.15: v1(-18.3,151.4) -15.744,153.956 ccw(c-17.54,155.752) -15,155.752 -15,170.148 ccw(c-17.54,170.148) -15.744,171.944 v1(-18.3,174.5)
NetD2_1: D2.1 D3.3 | length 26.8
  Top Layer w0.15: D3.3@-20.915,125.55 -20.809,125.656 cw(c-19.013,123.86) -19.013,126.4 v1(-18.3,126.4) ; D2.1@-19.085,149.45 -19.035,149.5 v1(-18.3,149.5)
  Bottom Layer w0.15: v1(-18.3,126.4) v1(-18.3,149.5)
NetD3_1: D3.1 D4.3 | length 29.3
  Top Layer w0.15: D4.3@-20.915,100.55 -20.809,100.656 cw(c-19.013,98.86) -19.013,101.4 v1(-18.3,101.4) ; D3.1@-19.085,124.45 -19.035,124.5 v1(-18.3,124.5)
  Bottom Layer w0.15: v1(-18.3,101.4) -15.744,103.956 ccw(c-17.54,105.752) -15,105.752 -15,120.148 ccw(c-17.54,120.148) -15.744,121.944 v1(-18.3,124.5)
NetD4_1: D4.1 D69.3 | length 26.8
  Top Layer w0.15: D69.3@-20.915,75.55 -20.809,75.656 cw(c-19.013,73.86) -19.013,76.4 v1(-18.3,76.4) ; D4.1@-19.085,99.45 -19.035,99.5 v1(-18.3,99.5)
  Bottom Layer w0.15: v1(-18.3,76.4) v1(-18.3,99.5)
NetD69_1: D69.1 D70.3 | length 29.3
  Top Layer w0.15: D70.3@-20.915,50.55 -20.809,50.656 cw(c-19.013,48.86) -19.013,51.4 v1(-18.3,51.4) ; D69.1@-19.085,74.45 -19.035,74.5 v1(-18.3,74.5)
  Bottom Layer w0.15: v1(-18.3,51.4) -15.744,53.956 ccw(c-17.54,55.752) -15,55.752 -15,70.148 ccw(c-17.54,70.148) -15.744,71.944 v1(-18.3,74.5)
NetD70_1: D70.1 D71.3 | length 26.8
  Top Layer w0.15: D71.3@-20.915,25.55 -20.809,25.656 cw(c-19.013,23.86) -19.013,26.4 v1(-18.3,26.4) ; D70.1@-19.085,49.45 -19.035,49.5 v1(-18.3,49.5)
  Bottom Layer w0.15: v1(-18.3,26.4) v1(-18.3,49.5)
NetD71_1: D71.1 D72.3 | length 29.3
  Top Layer w0.15: D72.3@-20.915,0.55 -20.809,0.656 cw(c-19.013,-1.14) -19.013,1.4 v1(-18.3,1.4) ; D71.1@-19.085,24.45 -19.035,24.5 v1(-18.3,24.5)
  Bottom Layer w0.15: v1(-18.3,1.4) -15.744,3.956 ccw(c-17.54,5.752) -15,5.752 -15,20.148 ccw(c-17.54,20.148) -15.744,21.944 v1(-18.3,24.5)
NetD72_1: D72.1 D73.3 | length 213.7
  Top Layer w0.15: D72.1@-19.085,-0.55 v1(-17.05,-0.55) ; D73.3@4.085,175.55 4.191,175.656 cw(c5.987,173.86) 5.987,176.4 v1(6.7,176.4)
  Bottom Layer w0.15: v1(-17.05,-0.55) -13.878,-3.722 ccw(c-12.082,-1.926) -12.082,-4.466 6.034,-4.466 ccw(c6.034,-3.5) 7,-3.5 7,-1.052 cw(c9.54,-1.052) 7.744,0.744 9.816,2.816 ccw(c8.02,4.612) 10.56,4.612 10.56,171.488 ccw(c8.02,171.488) 9.816,173.284 v1(6.7,176.4)
NetD73_1: D73.1 D74.3 | length 29.3
  Top Layer w0.15: D74.3@4.085,150.55 4.191,150.656 cw(c5.987,148.86) 5.987,151.4 v1(6.7,151.4) ; D73.1@5.915,174.45 5.965,174.5 v1(6.7,174.5)
  Bottom Layer w0.15: v1(6.7,151.4) 9.256,153.956 ccw(c7.46,155.752) 10,155.752 10,170.148 ccw(c7.46,170.148) 9.256,171.944 v1(6.7,174.5)
NetD74_1: D74.1 D75.3 | length 26.8
  Top Layer w0.15: D75.3@4.085,125.55 4.191,125.656 cw(c5.987,123.86) 5.987,126.4 v1(6.7,126.4) ; D74.1@5.915,149.45 5.965,149.5 v1(6.7,149.5)
  Bottom Layer w0.15: v1(6.7,126.4) v1(6.7,149.5)
NetD75_1: D75.1 D76.3 | length 29.3
  Top Layer w0.15: D76.3@4.085,100.55 4.191,100.656 cw(c5.987,98.86) 5.987,101.4 v1(6.7,101.4) ; D75.1@5.915,124.45 5.965,124.5 v1(6.7,124.5)
  Bottom Layer w0.15: v1(6.7,101.4) 9.256,103.956 ccw(c7.46,105.752) 10,105.752 10,120.148 ccw(c7.46,120.148) 9.256,121.944 v1(6.7,124.5)
NetD76_1: D76.1 D77.3 | length 26.8
  Top Layer w0.15: D77.3@4.085,75.55 4.191,75.656 cw(c5.987,73.86) 5.987,76.4 v1(6.7,76.4) ; D76.1@5.915,99.45 5.965,99.5 v1(6.7,99.5)
  Bottom Layer w0.15: v1(6.7,76.4) v1(6.7,99.5)
NetD77_1: D77.1 D78.3 | length 29.3
  Top Layer w0.15: D78.3@4.085,50.55 4.191,50.656 cw(c5.987,48.86) 5.987,51.4 v1(6.7,51.4) ; D77.1@5.915,74.45 5.965,74.5 v1(6.7,74.5)
  Bottom Layer w0.15: v1(6.7,51.4) 9.256,53.956 ccw(c7.46,55.752) 10,55.752 10,70.148 ccw(c7.46,70.148) 9.256,71.944 v1(6.7,74.5)
NetD78_1: D78.1 D79.3 | length 26.8
  Top Layer w0.15: D79.3@4.085,25.55 4.191,25.656 cw(c5.987,23.86) 5.987,26.4 v1(6.7,26.4) ; D78.1@5.915,49.45 5.965,49.5 v1(6.7,49.5)
  Bottom Layer w0.15: v1(6.7,26.4) v1(6.7,49.5)
NetD79_1: D79.1 D80.3 | length 29.3
  Top Layer w0.15: D80.3@4.085,0.55 4.191,0.656 cw(c5.987,-1.14) 5.987,1.4 v1(6.7,1.4) ; D79.1@5.915,24.45 5.965,24.5 v1(6.7,24.5)
  Bottom Layer w0.15: v1(6.7,1.4) 9.256,3.956 ccw(c7.46,5.752) 10,5.752 10,20.148 ccw(c7.46,20.148) 9.256,21.944 v1(6.7,24.5)
NetD80_1: D80.1 D81.3 | length 216.5
  Top Layer w0.15: D80.1@5.915,-0.55 v1(7.95,-0.55) ; D81.3@29.191,175.656 cw(c30.987,173.86) 30.987,176.4 ; D81.3@29.191,175.656 cw(c30.987,173.86) 30.987,176.4 ; D81.3@29.191,175.656 D81.3@29.085,175.55 D81.3@29.191,175.656 ; 30.987,176.4 v1(31.7,176.4) 30.987,176.4
  Bottom Layer w0.15: v1(7.95,-0.55) 11.122,-3.722 ccw(c12.918,-1.926) 12.918,-4.466 31.034,-4.466 ccw(c31.034,-3.5) 32,-3.5 32,-1.052 cw(c34.54,-1.052) 32.744,0.744 34.816,2.816 ccw(c33.02,4.612) 35.56,4.612 35.56,171.488 ccw(c33.02,171.488) 34.816,173.284 v1(31.7,176.4)
  other v1: 31.7,176.4
NetD81_1: D81.1 D82.3 | length 29.3
  Top Layer w0.15: D82.3@29.085,150.55 29.191,150.656 cw(c30.987,148.86) 30.987,151.4 v1(31.7,151.4) ; D81.1@30.915,174.45 30.965,174.5 v1(31.7,174.5)
  Bottom Layer w0.15: v1(31.7,151.4) 34.256,153.956 ccw(c32.46,155.752) 35,155.752 35,170.148 ccw(c32.46,170.148) 34.256,171.944 v1(31.7,174.5)
NetD82_1: D82.1 D83.3 | length 26.8
  Top Layer w0.15: D83.3@29.085,125.55 29.191,125.656 cw(c30.987,123.86) 30.987,126.4 v1(31.7,126.4) ; D82.1@30.915,149.45 30.965,149.5 v1(31.7,149.5)
  Bottom Layer w0.15: v1(31.7,126.4) v1(31.7,149.5)
NetD83_1: D83.1 D84.3 | length 29.3
  Top Layer w0.15: D84.3@29.085,100.55 29.191,100.656 cw(c30.987,98.86) 30.987,101.4 v1(31.7,101.4) ; D83.1@30.915,124.45 30.965,124.5 v1(31.7,124.5)
  Bottom Layer w0.15: v1(31.7,101.4) 34.256,103.956 ccw(c32.46,105.752) 35,105.752 35,120.148 ccw(c32.46,120.148) 34.256,121.944 v1(31.7,124.5)
NetD84_1: D84.1 D85.3 | length 26.8
  Top Layer w0.15: D85.3@29.085,75.55 29.191,75.656 cw(c30.987,73.86) 30.987,76.4 v1(31.7,76.4) ; D84.1@30.915,99.45 30.965,99.5 v1(31.7,99.5)
  Bottom Layer w0.15: v1(31.7,76.4) v1(31.7,99.5)
NetD85_1: D85.1 D86.3 | length 29.3
  Top Layer w0.15: D86.3@29.085,50.55 29.191,50.656 cw(c30.987,48.86) 30.987,51.4 v1(31.7,51.4) ; D85.1@30.915,74.45 30.965,74.5 v1(31.7,74.5)
  Bottom Layer w0.15: v1(31.7,51.4) 34.256,53.956 ccw(c32.46,55.752) 35,55.752 35,70.148 ccw(c32.46,70.148) 34.256,71.944 v1(31.7,74.5)
NetD86_1: D86.1 D87.3 | length 26.8
  Top Layer w0.15: D87.3@29.085,25.55 29.191,25.656 cw(c30.987,23.86) 30.987,26.4 v1(31.7,26.4) ; D86.1@30.915,49.45 30.965,49.5 v1(31.7,49.5)
  Bottom Layer w0.15: v1(31.7,26.4) v1(31.7,49.5)
NetD87_1: D87.1 D88.3 | length 29.3
  Top Layer w0.15: D88.3@29.085,0.55 29.191,0.656 cw(c30.987,-1.14) 30.987,1.4 v1(31.7,1.4) ; D87.1@30.915,24.45 30.965,24.5 v1(31.7,24.5)
  Bottom Layer w0.15: v1(31.7,1.4) 34.256,3.956 ccw(c32.46,5.752) 35,5.752 35,20.148 ccw(c32.46,20.148) 34.256,21.944 v1(31.7,24.5)
NetD88_1: D88.1 D89.3 | length 216.5
  Top Layer w0.15: D88.1@30.915,-0.55 v1(32.95,-0.55) ; D89.3@54.191,175.656 cw(c55.987,173.86) 55.987,176.4 ; D89.3@54.191,175.656 cw(c55.987,173.86) 55.987,176.4 ; D89.3@54.191,175.656 D89.3@54.085,175.55 D89.3@54.191,175.656 ; 55.987,176.4 v1(56.7,176.4) 55.987,176.4
  Bottom Layer w0.15: v1(32.95,-0.55) 36.122,-3.722 ccw(c37.918,-1.926) 37.918,-4.466 56.034,-4.466 ccw(c56.034,-3.5) 57,-3.5 57,-1.052 cw(c59.54,-1.052) 57.744,0.744 59.816,2.816 ccw(c58.02,4.612) 60.56,4.612 60.56,171.488 ccw(c58.02,171.488) 59.816,173.284 v1(56.7,176.4)
  other v1: 56.7,176.4
NetD89_1: D89.1 D90.3 | length 29.3
  Top Layer w0.15: D90.3@54.085,150.55 54.191,150.656 cw(c55.987,148.86) 55.987,151.4 v1(56.7,151.4) ; D89.1@55.915,174.45 55.965,174.5 v1(56.7,174.5)
  Bottom Layer w0.15: v1(56.7,151.4) 59.256,153.956 ccw(c57.46,155.752) 60,155.752 60,170.148 ccw(c57.46,170.148) 59.256,171.944 v1(56.7,174.5)

## Text inside footprints (layer, text, board x,y; h text height)
J1: Comments "PCB Edge" at 69.8,195.9 h0.61 r180